# Altium PCB Xiao esp32.PcbDoc
Units mm, origin at the board's own origin, x right, y up, seen from the top; angles counter-clockwise.
Board outline 82.32 x 64.78 mm, 2 copper layers (Top Layer, Bottom Layer); 28 components, 22 nets, 111 pads, 23 vias.
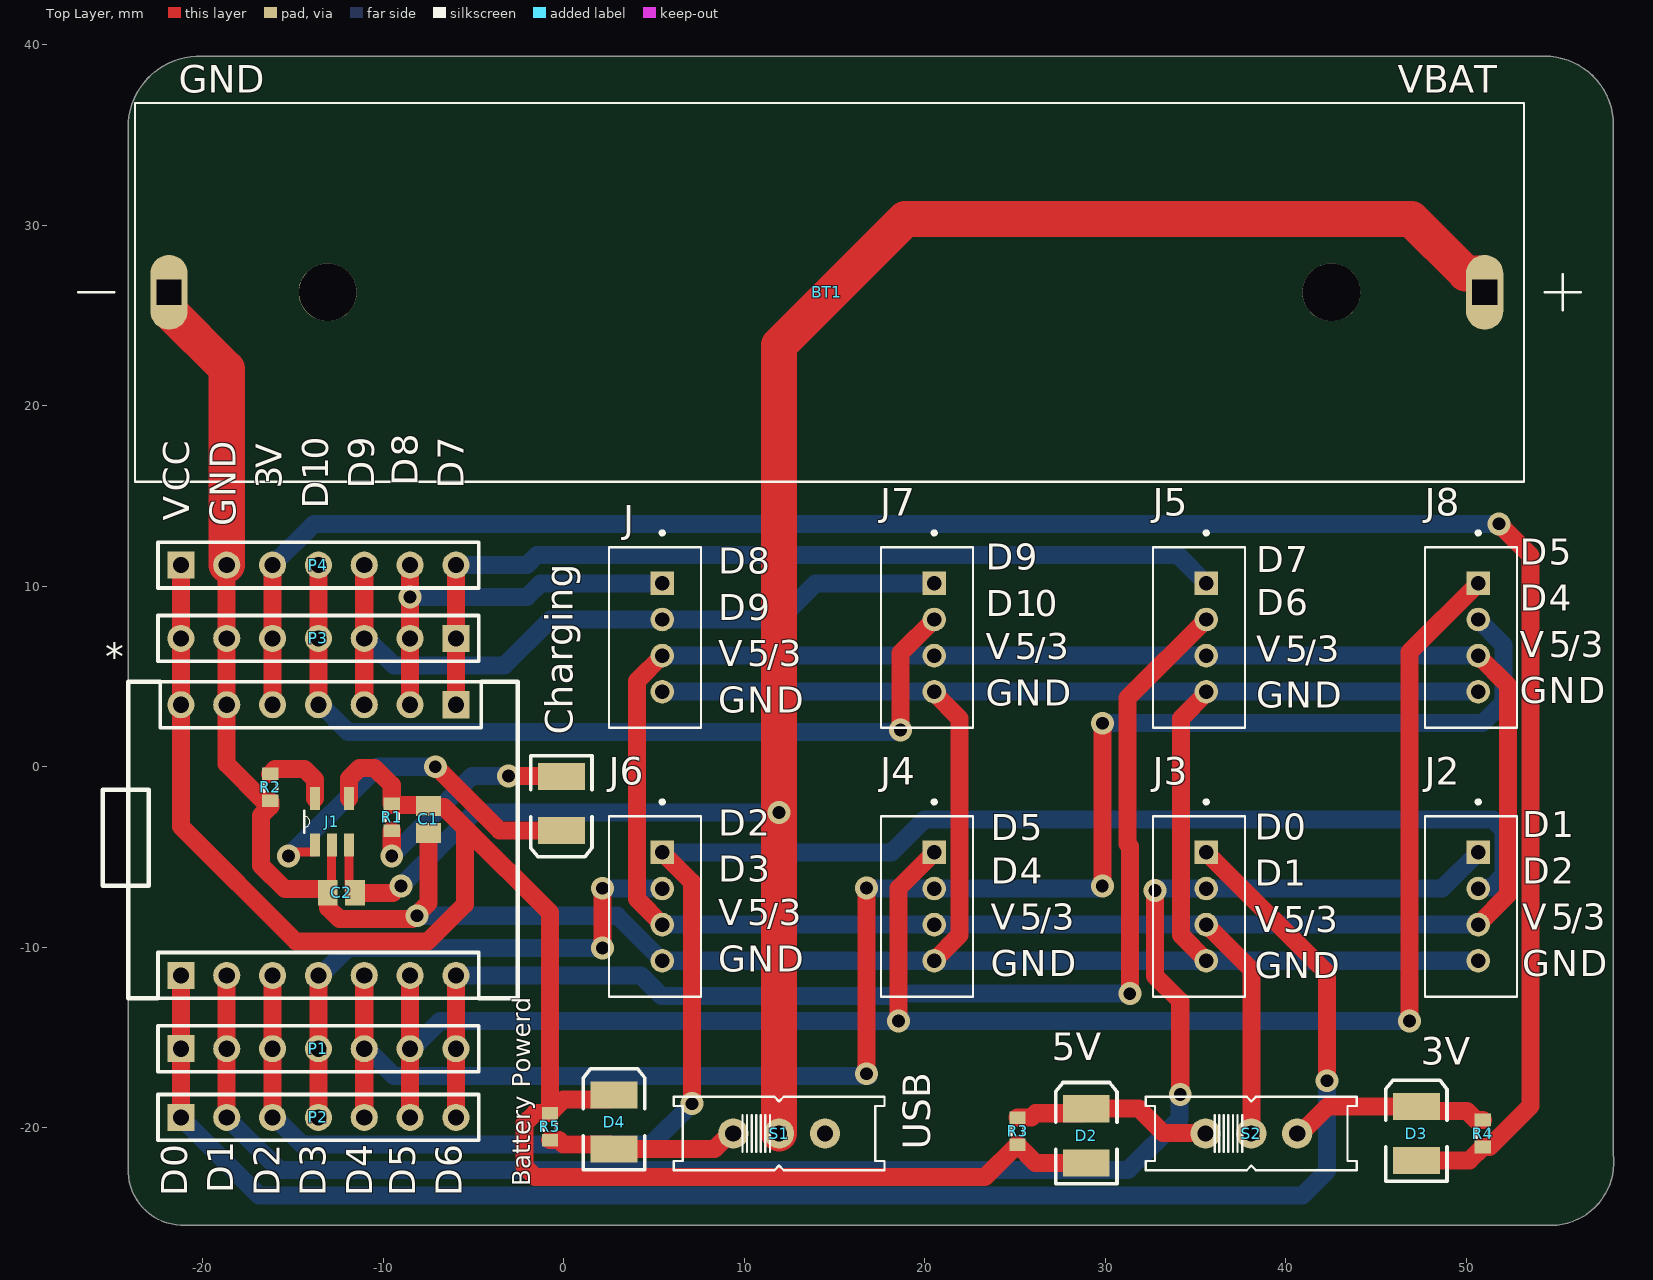
[diagram p0: Top Layer view]
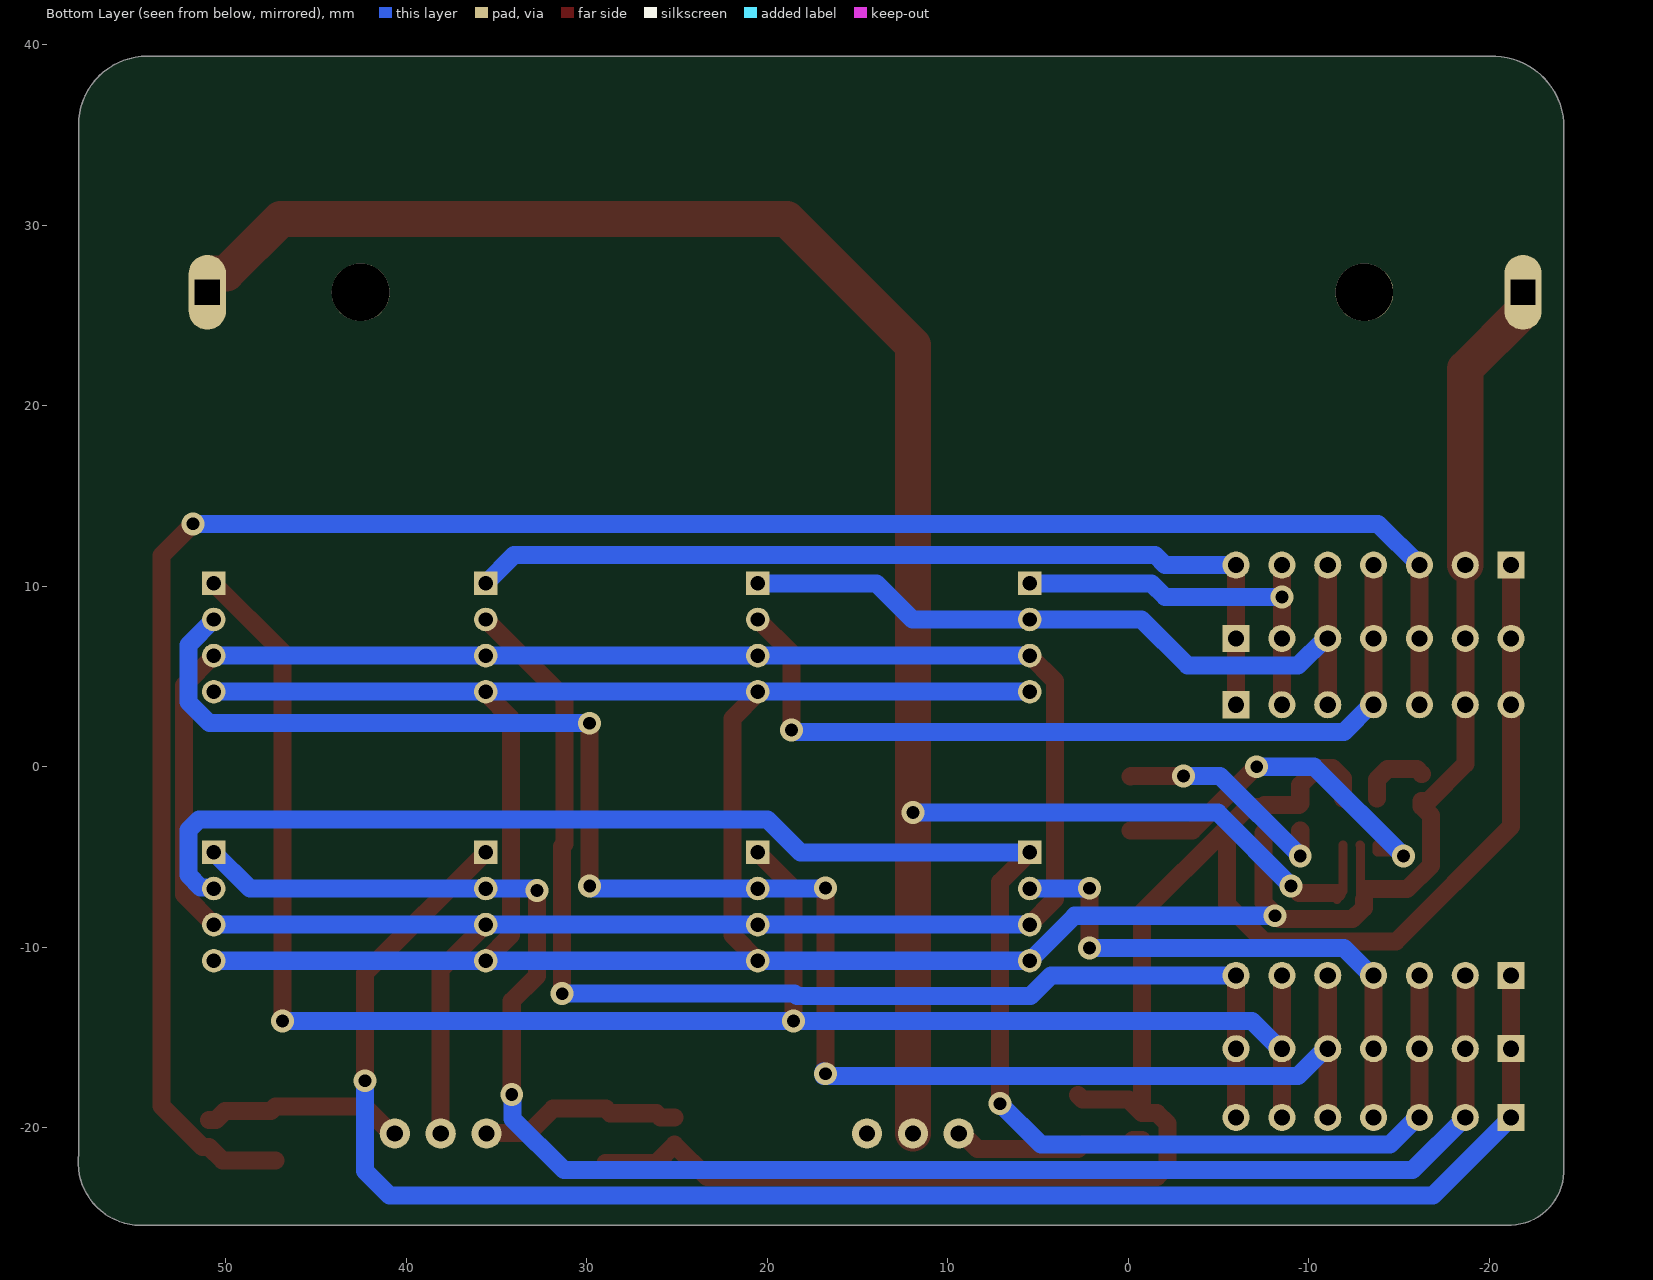
[diagram p1: Bottom Layer view, seen from below]

## Layer stack, top to bottom
Top Solder: solder mask 0.0102, Solder Resist, Dk 3.5
Top Layer: signal copper 0.0356
Dielectric 1: dielectric 0.32, FR-4, Dk 4.8
Bottom Layer: signal copper 0.0356
Bottom Solder: solder mask 0.0102, Solder Resist, Dk 3.5

## Board outline
-24.13,-22.485 cw(c-24.005,-22.479) -24.13,-22.479 -24.13,35.304 cw(c-20.193,35.433) -24.13,35.562 -24.13,35.666 cw(c-24.003,35.666) -24.123,35.709 cw(c-20.193,35.433) -20.324,39.37 cw(c-20.32,39.247) -20.319,39.37 51.943,39.37 54.356,39.37 cw(c54.356,39.298) 54.357,39.37 ccw(c54.357,39.299) 54.356,39.37 54.357,39.37 cw(c54.356,35.56) 58.166,35.56 58.166,-21.208 58.179,-21.973 cw(c58.058,-22.012) 58.185,-22.012 cw(c58.069,-22.013) 58.185,-22.016 cw(c54.687,-21.915) 54.741,-25.414 cw(c54.739,-25.286) 54.682,-25.4 52.861,-25.4 -20.952,-25.4 cw(c-21.082,-22.352)

## Design rules (kind name [scope] priority, off if disabled: settings)
Clearance [All] p1: gap=0.254 ignorepadtopadclearanceinfootprint=FALSE except(0: Arc-Hole Track-Hole SMDPad-Hole THPad-Hole Via-Hole Fill-Hole Poly-Hole Region-Hole Text-Hole)
ComponentClearance [All] p1 off: gap=0.254 collisioncheckmode=3 verticalgap=0.254 showdistances=FALSE
PolygonConnect [All] p1: connectstyle=Relief reliefconductorwidth=0.254 reliefentries=4 polygonreliefangle="90 Angle" airgapwidth=0.254
RoutingVias [All] p1: holewidth=0.711 width=1.27 viastyle="Through Hole" minholewidth=0.711 minwidth=1.27 maxholewidth=0.711 maxwidth=1.27
SolderMaskExpansion [All] p1: expansion=0.102 istentingtop=FALSE
Width [All] p1: maxlimit=10 minlimit=0.254 preferedwidth=1 minimp=50.000000 maximp=50.000000 favimp=50.000000
29 further rules are at their usual default settings.

## Components (designator, comment, footprint, x,y, rotation, side; value= is the part's Value field where it differs from the comment)
* "Xiao esp32 c3" "Xiao esp32c3" -13.589,-4.064 r90 top locked
BT1 "BK-18650-PC2" BAT_BK-18650-PC2 14.732,26.289 r180 top locked
C1 "Cap Pol3" C0805 -7.493,-2.921 r270 top locked value=100pF
C2 "Cap Pol3" C0805 -12.319,-6.985 r180 top value=100pF
Charging "LED3" 3.5X2.8X1.9 -0.127,-2.032 r270 top locked (schematic designator D1)
D2 "LED3" 3.5X2.8X1.9 28.956,-20.447 r90 top locked
D3 "LED3" 3.5X2.8X1.9 47.244,-20.32 r90 top locked
D4 "LED3" 3.5X2.8X1.9 2.794,-19.685 r90 top locked
J "110990030" SEEED_110990030 5.461,7.16 r270 top locked
J1 "MCP73831T-2ACI/OT" SOT95P280X145-5N -12.827,-3.048 r90 top locked
J2 "110990030" SEEED_110990030 50.673,-7.747 r270 top locked
J3 "110990030" SEEED_110990030 35.602,-7.747 r270 top locked
J4 "110990030" SEEED_110990030 20.532,-7.747 r270 top locked
J5 "110990030" SEEED_110990030 35.602,7.16 r270 top locked
J6 "110990030" SEEED_110990030 5.461,-7.747 r270 top locked
J7 "110990030" SEEED_110990030 20.532,7.16 r270 top locked
J8 "110990030" SEEED_110990030 50.673,7.16 r270 top locked
P1 "Header 7" HDR1X7 -21.209,-15.621 r0 top locked
P2 "Header 7" HDR1X7 -21.209,-19.431 r0 top locked
P3 "Header 7" HDR1X7 -5.969,7.112 r180 top locked
P4 "Header 7" HDR1X7 -21.209,11.176 r0 top locked
R1 "Res3" J1-0603 -9.525,-2.794 r270 top locked value=1K
R2 "Res3" J1-0603 -16.256,-1.143 r90 top locked value=1K
R3 "Res3" J1-0603 25.146,-20.193 r90 top locked value=1K
R4 "Res3" J1-0603 50.927,-20.32 r90 top locked value=1K
R5 "Res3" J1-0603 -0.762,-19.939 r90 top locked value=1K
S1 "EG1218" EG1218 11.938,-20.32 r0 top locked
S2 "EG1218" EG1218 38.1,-20.32 r0 top locked

## Footprints (in the part's own frame and the unit in brackets; to place one, negate y for a bottom-side part, rotate by r counter-clockwise, add the part's x,y. Pads: shape width x height; smd on the part's side, far side on the other; paste and mask are expansions set on the pad)
3.5X2.8X1.9 [mm] "SM LED; 2 C-Bend Leads; Body 3.5 x 2.8 x 1.9 mm, inc leads (LxWxH typ)"
  rect 1.5x2.6 smd: 1(-1.5,0) 2(1.5,0)
  silkscreen extent -2.65,-1.7 2.95,1.7
BAT_BK-18650-PC2 [mm]
  oval 2.07x4.14 hole 1.38 square: NEG(36.6,0) POS(-36.3,0)
  round 3.2 hole 3.2 unplated: ""(-27.805,0) ""(27.81,0)
  silkscreen extent -41.63,-10.49 41.63,10.49
C0805 [mm] "Chip Capacitor, Body 2.0x1.3mm, IPC High Density"
  rect 1.1x1.4 smd: 1(-0.75,0) 2(0.75,0)
  body extent -1.1,-0.72 1.1,0.72, height 1.4
EG1218 [mil]
  round 66 hole 35.43: O(-100,0) P(0,0) S(100,0)
  silkscreen extent -230,-80 230,80, body extent -228,-276 228,201, height 79
HDR1X7 [mm] "Connector; Header; 7 Position"
  rect 1.5x1.5 hole 0.9: 1(0,0)
  round 1.5 hole 0.9: 2(2.54,0) 3(5.08,0) 4(7.62,0) 5(10.16,0) 6(12.7,0) 7(15.24,0)
  silkscreen extent -1.27,-1.27 16.51,1.27
J1-0603 [mm] "Chip Resistor, Body 1.6x0.8mm, IPC High Density"
  rect 0.7x0.9 smd: 1(-0.75,0) 2(0.75,0)
  silkscreen extent -0.2,-0.35 0.2,0.35, body extent -0.85,-0.48 0.85,0.48, height 0.9
SEEED_110990030 [mm]
  rect 1.308x1.308 hole 0.8: 1(-3,0)
  round 1.308 hole 0.8: 2(-1,0) 3(1,0) 4(3,0)
  silkscreen extent -5.9,-2.95 5,2.15
SOT95P280X145-5N [mil]
  rect 50x22 smd: 1(-51,37) 2(-51,0) 3(-51,-37) 4(51,-37) 5(51,37)
  silkscreen extent -24,49 24,61, body extent -53,-57 53,57, height 57
"Xiao esp32c3" [mm]
  rect 1.5x1.5 hole 0.9: 1(-7.5,7.62) 14(7.5,-7.62)
  round 1.5 hole 0.9: 2(-7.5,5.08) 3(-7.5,2.54) 4(-7.5,0) 5(-7.5,-2.54) 6(-7.5,-5.08) 7(-7.5,-7.62) 8(7.5,7.62) 9(7.5,5.08) 10(7.5,2.54) 11(7.5,0) 12(7.5,-2.54) 13(7.5,-5.08)
  silkscreen extent -8.77,-11.05 8.77,11.94

## Part data
BT1: "Battery Holder (Open) 18650 1 Cell PC Pin", Package=None, Availability=Unavailable, MP=BK-18650-PC2, Price=None
C1 C2: "Polarized Capacitor (Surface Mount)", LatestRevisionDate=29-May-2009, LatestRevisionNote="IPC-7351 Footprint Added.", PackageDescription="Chip Capacitor", PackageReference=C0805, Published=8-Jun-2000, Publisher="Altium Limited"
Charging D2 D3 D4: "Typical BLUE SiC LED", DatasheetVersion=16-Apr-2002, LatestRevisionDate=17-Dec-2003, LatestRevisionNote="PCB Footprint replaced.", PackageDescription="SM LED; 2 C-Bend Leads; Body 3.5 x 2.8 x 1.9 mm, inc leads (LxWxH typ)", PackageReference=3.5X2.8X1.9, PackageVersion=16-Apr-2002, Published=8-Jun-2000, Publisher="Altium Limited"
J J2 J3 J4 J5 J6 J7 J8: "GROVE 2MM 4PIN VERT CONN 10PCS", Package=None, Arrow_Electronics-Purchase-URL=https://snapeda.com/shop?store=Arrow+Electronics&id=583576, Availability=Good, MF="Seeed Technology", Mouser-Purchase-URL=https://snapeda.com/shop?store=Mouser&id=583576, MP=110990030, Price=None, SnapEDA_Link=https://www.snapeda.com/parts/110990030/Seeed%20Technology%20Co.,%20Ltd/view-part/583576/?ref=snap
J1: "Charger IC Lithium Ion/Polymer SOT-23-5", Package="SOT-23 Microchip", Availability="In Stock", Check_prices=https://www.snapeda.com/parts/MCP73831T-2ACI/OT/Microchip/view-part/?ref=eda, MF=Microchip, MP=MCP73831T-2ACI/OT, Price=None, Purchase-URL=https://pricing.snapeda.com/search/part/MCP73831T-2ACI/OT/?ref=eda, SnapEDA_Link=https://www.snapeda.com/parts/MCP73831T-2ACI/OT/Microchip/view-part/?ref=snap
P1 P2 P3 P4: "Header, 7-Pin", LatestRevisionDate=17-Jul-2002, LatestRevisionNote="Re-released for DXP Platform.", Publisher="Altium Limited"
R1 R2 R3 R4 R5: "Resistor", LatestRevisionDate=29-May-2009, LatestRevisionNote="IPC-7351 Footprint Added.", PackageDescription="Chip Resistor", PackageReference=J1-0603, Published=8-Jun-2000, Publisher="Altium Limited"
S1 S2: "Slide Switch SPDT Through Hole", Package=None, Availability="In Stock", Check_prices=https://www.snapeda.com/parts/EG1218/E-Switch/view-part/?ref=eda, MF=E-Switch, MP=EG1218, Price=None, Purchase-URL=https://pricing.snapeda.com/search/part/EG1218/?ref=eda, SnapEDA_Link=https://www.snapeda.com/parts/EG1218/E-Switch/view-part/?ref=snap

## Via types
v1: diameter 1.27, hole 0.711, Top Layer to Bottom Layer, 23 vias

## Nets (pads, with @x,y where several pads share a name; then routed paths per layer and width w, separated by ;. In a path a pad name is that pad's centre, name@x,y a point inside that pad or via, vN(x,y) a via of type N, cw(c..) or ccw(c..) an arc to the next point about the centre after c; other vN are vias at no path point)
GND: *.9 BT1.NEG C1.2 C2.2 J1.2 J2.4 J3.4 J4.4 J5.4 J6.4 J7.4 J8.4 J.4 P3.6 P4.2 R2.1 | length 189.6
  Top Layer w0.5: C2.2@-13.057,-7.366 -12.856,-7.165 -12.856,-4.373 J1.2
  Top Layer w1: P4.2 P3.6 *.9 -18.669,0.154 -16.622,-1.893 R2.1 -16.256,-2.198 -16.764,-2.706 -16.764,-5.461 -15.44,-6.785 C2.2@-13.119,-6.785 ; C2.2@-13.057,-7.366 -13.057,-7.813 -12.431,-8.439 -8.385,-8.439 -8.201,-8.255 v1(-8.128,-8.255) -8.128,-8.182 -7.493,-7.547 -7.493,-3.721 C1.2 ; J4.4 20.532,-10.738 21.94,-9.33 21.94,2.669 20.532,4.077 J7.4 ; J3.4 35.602,-10.738 34.194,-9.33 34.194,2.669 35.602,4.077 J5.4
  Top Layer w2: BT1.NEG -21.868,25.254 -18.669,22.055 P4.2
  Bottom Layer w1: v1(-8.128,-8.255) 2.969,-8.255 J6.4 J4.4 J3.4 J2.4 ; J.4 J7.4 J5.4 J8.4
Net*_1: *.1 J3.1 P1.1 P2.1 | length 94.1
  Top Layer w1: P2.1 P1.1 *.1 ; J3.1 42.291,-11.436 v1(42.291,-17.399)
  Bottom Layer w1: P2.1 -16.891,-23.749 40.943,-23.749 42.291,-22.401 v1(42.291,-17.399)
Net*_2: *.2 J2.1 J3.2 P1.2 P2.2 | length 95.1
  Top Layer w1: P2.2 P1.2 *.2 ; v1(32.766,-6.858) 32.766,-11.592 34.163,-12.989 v1(34.163,-18.161)
  Bottom Layer w1: P2.2 -15.748,-22.352 31.276,-22.352 34.111,-19.517 34.111,-18.213 v1(34.163,-18.161) ; v1(32.766,-6.858) 32.839,-6.858 32.95,-6.747 48.673,-6.747 J2.1
Net*_3: *.3 J2.2 J6.1 P1.3 P2.3 | length 99
  Top Layer w1: P2.3 P1.3 *.3 ; J6.1 7.112,-6.398 v1(7.112,-18.669)
  Bottom Layer w1: P2.3 -15.994,-19.431 -14.49,-20.935 4.846,-20.935 v1(7.112,-18.669) ; J6.1 18.157,-4.747 19.983,-2.921 51.495,-2.921 52.081,-3.507 52.081,-6.007 51.4,-6.688 50.815,-6.688 J2.2@50.756,-6.747
Net*_4: *.4 J6.2 P1.4 P2.4 | length 30.9
  Top Layer w1: P2.4 P1.4 *.4 ; v1(2.159,-10.033) v1(2.159,-6.731)
  Bottom Layer w1: *.4 -13.469,-11.564 -11.938,-10.033 v1(2.159,-10.033) ; v1(2.159,-6.731) 2.167,-6.739 5.453,-6.739 J6.2
Net*_5: *.5 J4.2 J8.2 P1.5 P2.5 | length 97.2
  Top Layer w1: P2.5 P1.5 *.5 ; v1(16.774,-17.008) v1(16.774,-6.721) v1@16.891,-6.604 ; v1(29.845,-6.604) 29.845,2.405 v1(29.853,2.413)
  Bottom Layer w1: P1.5 -10.914,-15.621 -9.41,-17.125 16.891,-17.125 v1@16.891,-16.891 ; v1(16.774,-6.721) 16.787,-6.734 20.519,-6.734 J4.2 29.702,-6.747 v1(29.845,-6.604) ; v1(29.853,2.413) 50.917,2.413 52.081,3.577 52.081,6.743 50.673,8.151 J8.2
Net*_6: *.6 J4.1 J8.1 P1.6 P2.6 | length 99.9
  Top Layer w1: P2.6 P1.6 *.6 ; v1(18.55,-14.089) 18.55,-6.729 J4.1 ; v1(46.871,-14.089) 46.871,6.358 J8.1
  Bottom Layer w1: P1.6 -8.374,-15.621 -6.842,-14.089 v1(18.55,-14.089) v1(46.871,-14.089)
Net*_7: *.7 J5.2 P1.7 P2.7 | length 68.3
  Top Layer w1: P2.7 P1.7 *.7 ; v1(31.369,-12.573) 31.369,-4.414 31.242,-4.287 31.242,3.8 J5.2
  Bottom Layer w1: *.7 4.287,-11.564 5.423,-12.7 18.359,-12.7 18.486,-12.573 v1(31.369,-12.573)
Net*_8: *.8 C1.1 D2.1 D4.2 J1.4 P3.7 P4.1 R1.1 R3.1 R5.2 | length 106
  Top Layer w1: P4.1 P3.7 *.8 -21.209,-3.302 -14.818,-9.693 -7.534,-9.693 -5.461,-7.62 -5.461,-3.387 ; J1.4 -11.887,-0.654 -11.301,-0.068 -10.473,-0.068 -9.525,-1.016 R1.1 -9.448,-2.121 -7.543,-2.121 C1.1 -7.443,-2.221 -6.627,-2.221 -5.461,-3.387 ; D4.2 2.544,-18.435 -0.006,-18.435 -0.76,-19.189 R5.2 ; D2.1 26.15,-21.947 R3.1 23.356,-22.733 -1.573,-22.733 -2.159,-22.147 -2.159,-19.775 -1.573,-19.189 R5.2 ; -5.461,-3.387 -0.762,-8.086 R5.2
Net*_10: *.10 D3.1 P3.5 P4.3 R4.1 | length 117.2
  Top Layer w1: *.10 P3.5 P4.3 ; D3.1 50.177,-21.82 R4.1 51.293,-21.07 53.578,-18.785 53.578,11.7 v1(51.816,13.462)
  Bottom Layer w1: P4.3 -13.843,13.462 v1(51.816,13.462)
Net*_11: *.11 J7.2 P3.4 P4.4 | length 47.6
  Top Layer w1: *.11 P3.4 P4.4 ; v1(18.669,2.032) 18.669,6.297 J7.2
  Bottom Layer w1: *.11 -13.454,3.436 -11.95,1.932 18.496,1.932 18.596,2.032 v1(18.669,2.032)
Net*_12: *.12 J7.1 J.2 P3.3 P4.5 | length 41.8
  Top Layer w1: *.12 P3.3 P4.5
  Bottom Layer w1: P3.3 -10.914,7.112 -9.41,5.608 -3.292,5.608 -0.74,8.16 J.2 11.961,8.16 13.961,10.16 J7.1
Net*_13: *.13 J.1 P3.2 P4.6 | length 22
  Top Layer w1: *.13 P3.2 v1(-8.509,9.398) P4.6
  Bottom Layer w1: v1(-8.509,9.398) -2.046,9.398 -1.284,10.16 J.1
Net*_14: *.14 J5.1 P3.1 P4.7 | length 50.2
  Top Layer w1: *.14 P3.1 P4.7
  Bottom Layer w1: P4.7 -2.041,11.176 -1.489,11.728 34.034,11.728 J5.1
NetBT1_POS: BT1.POS C2.1 J1.3 S1.P | length 116.5
  Top Layer w0.5: J1.3 -11.887,-6.886 -11.557,-7.216 C2.1@-11.557,-7.366
  Top Layer w1: C2.1 -9.471,-6.985 -9.09,-6.604 v1(-9.017,-6.604)
  Top Layer w2: S1.P v1(11.938,-2.54) 11.938,23.368 18.923,30.353 46.968,30.353 49.984,27.337 51,27.337 51.032,27.305 BT1.POS
  Bottom Layer w1: v1(-9.017,-6.604) -4.953,-2.54 v1(11.938,-2.54)
NetD1_1: Charging.1 R1.2 | length 12.7
  Top Layer w1: v1(-9.525,-4.953) R1.2 ; v1(-3.048,-0.508) -3.036,-0.52 -0.139,-0.52 Charging.1
  Bottom Layer w1: v1(-9.525,-4.953) -5.08,-0.508 v1(-3.048,-0.508)
NetD1_2: Charging.2 J1.1 | length 20.6
  Top Layer w0.5: v1(-15.24,-4.953) -15.032,-4.953 -14.796,-4.718 -13.796,-4.718 -13.767,-4.688 J1.1
  Top Layer w1: v1(-7.112,0) -7.074,0 -3.542,-3.532 Charging.2
  Bottom Layer w1: v1(-15.24,-4.953) -10.287,0 v1(-7.112,0)
NetD2_2: D2.2 R3.2 S2.O | length 11.2
  Top Layer w1: R3.2 25.91,-19.443 26.156,-19.197 28.706,-19.197 D2.2 31.88,-18.947 33.222,-20.289 35.529,-20.289 S2.O
NetD3_2: D3.2 R4.2 S2.S | length 11.2
  Top Layer w1: S2.S 40.823,-20.32 42.323,-18.82 D3.2 47.494,-19.07 50.044,-19.07 50.544,-19.57 R4.2
NetD4_1: D4.1 R5.1 S1.O | length 10.7
  Top Layer w1: R5.1 -0.252,-20.689 -0.006,-20.935 2.544,-20.935 D4.1 8.35,-21.185 9.215,-20.32 S1.O
NetJ1_5: J1.5 R2.2 | length 3.9
  Top Layer w1: R2.2 -15.99,-0.127 -14.353,-0.127 -13.767,-0.713 J1.5
NetJ2_3: J2.3 J3.3 J4.3 J5.3 J6.3 J7.3 J8.3 J.3 S2.P | length 135.4
  Top Layer w1: J6.3 5.461,-8.738 4.053,-7.33 4.053,4.743 5.461,6.151 J.3 ; J3.3 38.1,-11.245 S2.P ; J2.3 50.673,-8.738 52.324,-7.087 52.324,4.5 50.673,6.151 J8.3
  Bottom Layer w1: J6.3 J4.3 J3.3 J2.3 ; J.3 J7.3 J5.3 J8.3
pads on no net: BT1. S1.S

## Silkscreen, mask and mechanical layers (free items; w line width, h text height)
Top Overlay:
  text "GND" at -21.336,37.338 h1.52
  text "VBAT" at 46.228,37.338 h1.52
  text "8" at -7.587,17.175 h2.49 r90
  text "0" at -12.552,17.008 h2.49 r90
  text "9" at -9.989,17.014 h2.49 r90
  text "7" at -5.024,17.014 h2.49 r90
  text "C" at -20.241,16.685 h2.49 r90
  text "D" at -17.678,16.523 h2.49 r90
  text "V" at -15.115,16.533 h2.49 r90
  text "1" at -12.552,15.887 h2.49 r90
  text "D" at -7.587,15.573 h2.49 r90
  text "3" at -15.115,15.412 h2.49 r90
  text "D" at -9.989,15.412 h2.49 r90
  text "D" at -5.024,15.412 h2.49 r90
  text "C" at -20.241,15.243 h2.49 r90
  text "N" at -17.678,14.921 h2.49 r90
  text "D" at -12.552,14.285 h2.49 r90
  text "V" at -20.241,13.641 h2.49 r90
  text "G" at -17.678,13.32 h2.49 r90
  text "D" at 52.978,10.701 h2.49
  text "5" at 54.579,10.701 h2.49
  text "D" at 23.387,10.414 h2.49
  text "9" at 24.988,10.414 h2.49
  text "D" at 38.373,10.287 h2.49
  text "7" at 39.974,10.287 h2.49
  text "D" at 8.561,10.193 h2.49
  text "8" at 10.163,10.193 h2.49
  text "D" at 52.978,8.138 h2.49
  text "4" at 54.579,8.138 h2.49
  text "D" at 38.373,7.884 h2.49
  text "6" at 39.974,7.884 h2.49
  text "D" at 23.387,7.851 h2.49
  text "1" at 24.988,7.851 h2.49
  text "0" at 26.11,7.851 h2.49
  text "D" at 8.561,7.63 h2.49
  text "9" at 10.163,7.63 h2.49
  text "V" at 52.978,5.575 h2.49
  text "5" at 54.579,5.575 h2.49
  text "/" at 55.701,5.575 h2.49
  text "3" at 56.341,5.575 h2.49
  text "V" at 23.387,5.448 h2.49
  text "5" at 24.988,5.448 h2.49
  text "/" at 26.11,5.448 h2.49
  text "3" at 26.75,5.448 h2.49
  text "V" at 38.373,5.321 h2.49
  text "5" at 39.974,5.321 h2.49
  text "/" at 41.096,5.321 h2.49
  text "3" at 41.736,5.321 h2.49
  text "V" at 8.561,5.067 h2.49
  text "5" at 10.163,5.067 h2.49
  text "/" at 11.285,5.067 h2.49
  text "3" at 11.925,5.067 h2.49
  text "G" at 52.978,3.012 h2.49
  text "N" at 54.579,3.012 h2.49
  text "D" at 56.181,3.012 h2.49
  text "G" at 23.387,2.885 h2.49
  text "N" at 24.988,2.885 h2.49
  text "D" at 26.59,2.885 h2.49
  text "G" at 38.373,2.758 h2.49
  text "N" at 39.974,2.758 h2.49
  text "D" at 41.576,2.758 h2.49
  text "G" at 8.561,2.504 h2.49
  text "N" at 10.163,2.504 h2.49
  text "D" at 11.765,2.504 h2.49
  text "D" at 8.561,-4.318 h2.49
  text "2" at 10.163,-4.318 h2.49
  text "D" at 53.105,-4.412 h2.49
  text "1" at 54.706,-4.412 h2.49
  text "D" at 38.279,-4.539 h2.49
  text "0" at 39.881,-4.539 h2.49
  text "D" at 23.674,-4.572 h2.49
  text "5" at 25.276,-4.572 h2.49
  text "D" at 8.561,-6.881 h2.49
  text "3" at 10.163,-6.881 h2.49
  text "D" at 23.674,-6.975 h2.49
  text "4" at 25.276,-6.975 h2.49
  text "D" at 53.105,-6.975 h2.49
  text "2" at 54.706,-6.975 h2.49
  text "D" at 38.279,-7.102 h2.49
  text "1" at 39.881,-7.102 h2.49
  text "V" at 8.561,-9.284 h2.49
  text "5" at 10.163,-9.284 h2.49
  text "/" at 11.285,-9.284 h2.49
  text "3" at 11.925,-9.284 h2.49
  text "V" at 23.674,-9.538 h2.49
  text "5" at 25.276,-9.538 h2.49
  text "/" at 26.398,-9.538 h2.49
  text "3" at 27.038,-9.538 h2.49
  text "V" at 53.105,-9.538 h2.49
  text "5" at 54.706,-9.538 h2.49
  text "/" at 55.828,-9.538 h2.49
  text "3" at 56.468,-9.538 h2.49
  text "V" at 38.279,-9.665 h2.49
  text "5" at 39.881,-9.665 h2.49
  text "/" at 41.003,-9.665 h2.49
  text "3" at 41.643,-9.665 h2.49
  text "G" at 8.561,-11.847 h2.49
  text "N" at 10.163,-11.847 h2.49
  text "D" at 11.765,-11.847 h2.49
  text "G" at 23.674,-12.101 h2.49
  text "N" at 25.276,-12.101 h2.49
  text "D" at 26.878,-12.101 h2.49
  text "G" at 53.105,-12.101 h2.49
  text "N" at 54.706,-12.101 h2.49
  text "D" at 56.308,-12.101 h2.49
  text "G" at 38.279,-12.228 h2.49
  text "N" at 39.881,-12.228 h2.49
  text "D" at 41.483,-12.228 h2.49
  text "5V" at 27.051,-16.256 h1.52
  text "3V" at 47.498,-16.51 h1.52
  text "USB" at 20.32,-21.209 h1.52 r90
  text "1" at -17.805,-22.034 h2.49 r90
  text "0" at -20.368,-22.195 h2.49 r90
  text "2" at -15.242,-22.195 h2.49 r90
  text "3" at -12.679,-22.195 h2.49 r90
  text "4" at -10.116,-22.195 h2.49 r90
  text "5" at -7.714,-22.195 h2.49 r90
  text "6" at -5.151,-22.195 h2.49 r90
  text "Battery Powerd" at -1.857,-23.241 h1 r90
  text "D" at -17.805,-23.636 h2.49 r90
  text "D" at -20.368,-23.797 h2.49 r90
  text "D" at -15.242,-23.797 h2.49 r90
  text "D" at -12.679,-23.797 h2.49 r90
  text "D" at -10.116,-23.797 h2.49 r90
  text "D" at -7.714,-23.797 h2.49 r90
  text "D" at -5.151,-23.797 h2.49 r90
Mechanical 15:
  lines w0.254: -24.003,35.306 cw(c-20.193,35.433) -20.32,39.243 51.943,39.243 54.356,39.243 cw(c54.356,35.56) 58.039,35.56 ; -24.003,35.666 -24.003,-22.479 ccw(c-21.082,-22.352) -20.955,-25.273 52.861,-25.273 54.739,-25.273 ; 54.739,-25.286 ccw(c54.687,-21.915) 58.058,-22.012 ; 58.039,35.56 58.039,35.56 ; 58.039,35.56 58.039,-21.209 58.052,-22.012 ; 58.052,-22.012 58.052,-22.012